# Altium PCB DE-130817.PcbDoc (part 2 of 4)
Units mil, origin at the board's own origin, x right, y up, seen from the top; angles counter-clockwise.
Board outline 5915.54 x 7594.09 mil, 2 copper layers (Top Layer, Bottom Layer), stack 12.8 mil thick; 405 components, 290 nets, 1180 pads, 331 vias.
Unrouted connection lines stored in the file: 1.
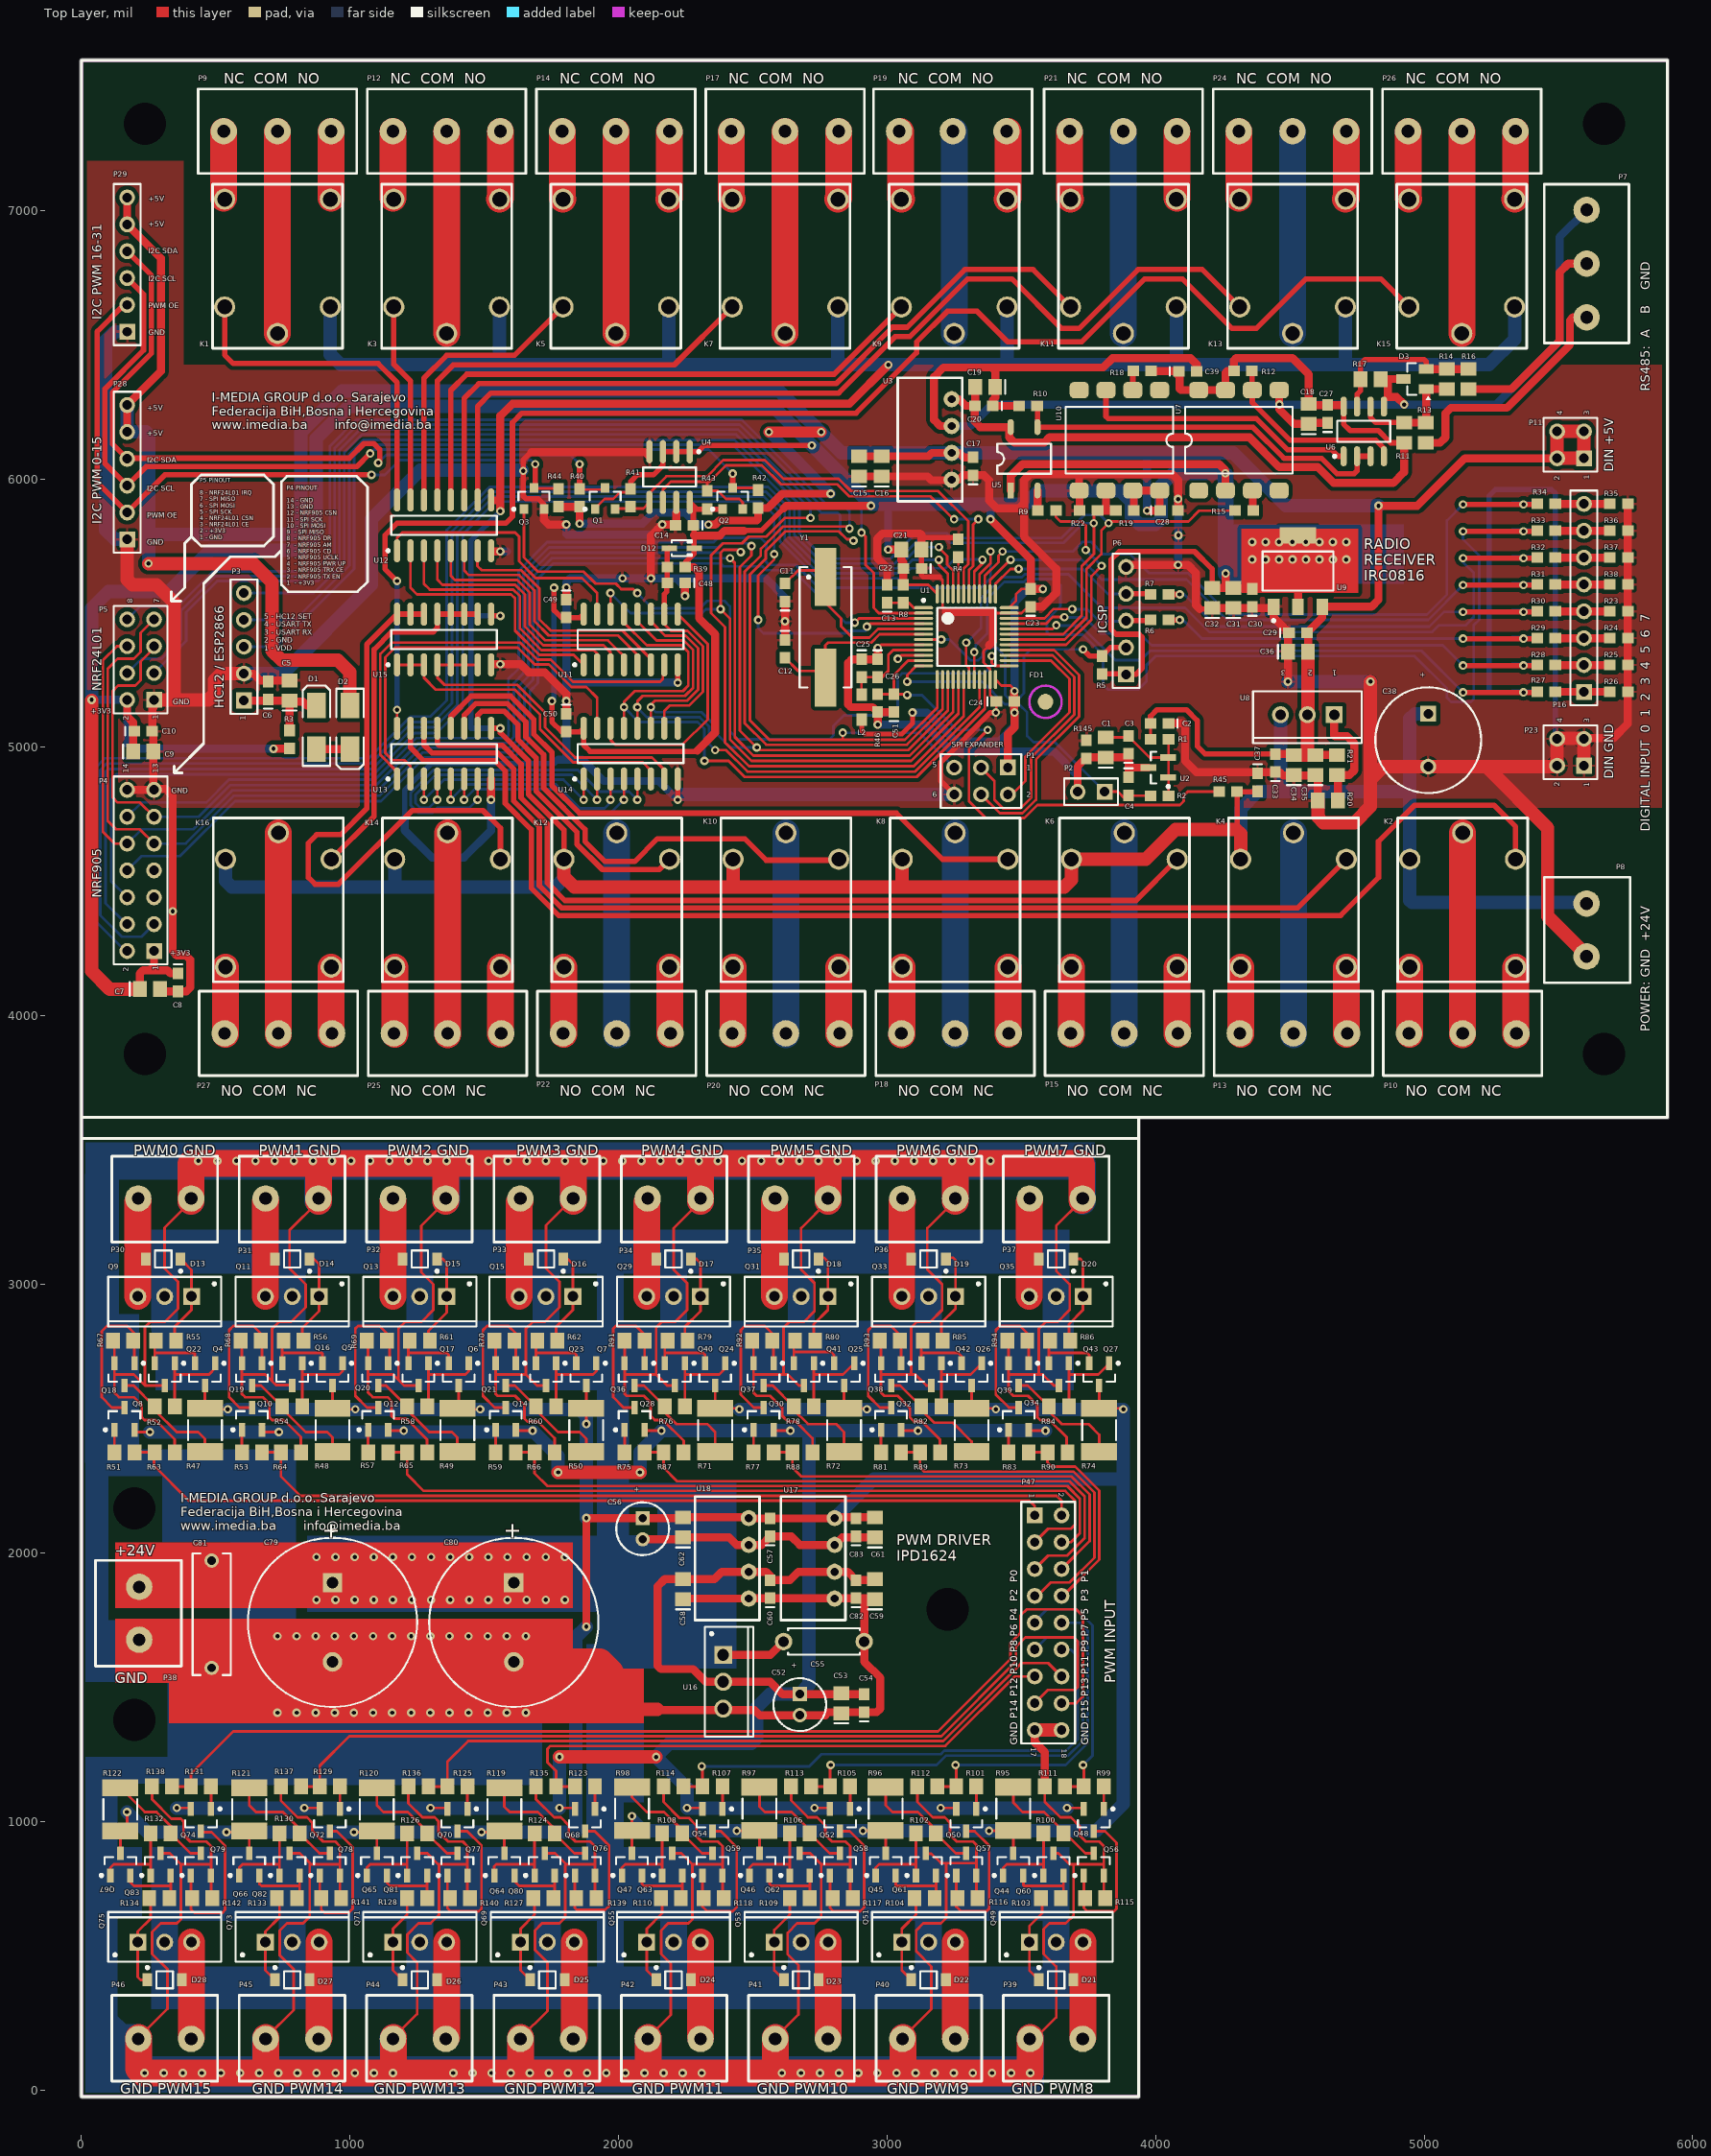
[diagram p0: Top Layer view]

## Part data (continued)
U4: library part 24AA64/SN, "64Kbit, 400kHz, 1.7V, I2C Serial EEPROM, 8-Pin SOIC 150mil, Commercial Temperature", Supplier Part Number 1=24AA64/SN-ND, Code_IPC=SOIC127P600-8, Code_JEDEC=MS-012, ComponentLink1Description=Datasheet, ComponentLink1URL=http://ww1.microchip.com/downloads/en/DeviceDoc/21189Q.pdf, ComponentLink2Description="Packaging Specification", ComponentLink2URL=http://www.microchip.com/stellent/groups/techpub_sg/documents/packagingspec/en012702.pdf, ComponentLink3Description="Microchip.com Home", ComponentLink3URL=http://www.microchip.com/, DatasheetVersion="revQ, Jun-2009", PackageDescription="8-Lead Plastic Small Outline (SN) - Narrow, 3.90mm Body [SOIC]", PackageReference=SOIC-SN8, PackageVersion="revBB, Aug-2009", Published=29-Jan-2009, Publisher="Altium Limited", Supplier 1=Digi-Key
U5: library part "PC817 optocoupler", "4-Pin Phototransistor Optocoupler", DatasheetVersion=Nov-2003, LatestRevisionDate=04-Mar-2005, LatestRevisionNote="Sch pins 3 & 4 Swapped.", PackageReference=DIP-4, Published=24-Mar-1999, Publisher="Altium Limited"
U6: "Differential Bus Transceiver", Code_IPC=SOIC127P600-8, ComponentLink1Description="Manufacturer Link", ComponentLink1URL=http://www.ti.com/, ComponentLink2Description=Datasheet, ComponentLink2URL=http://www-s.ti.com/sc/ds/sn75176b.pdf, DatasheetVersion=Sep-1989, LatestRevisionDate=13-Apr-2006, LatestRevisionNote="IPC-7351 Footprint Added.", Note="Receiver Hysteresis of 50mV Typical", PackageDescription="8-Pin Small Outline Integrated Circuit 1.27 mm Pitch", PackageReference=D008, PackageVersion=Jan-1998, Published=15-May-2002, Publisher="Altium Limited"
U7 U10: "High CMR, High Speed TTL Compatibile Optocoupler"
U8: "Three-Terminal Adjustable Output Positive Voltage Regulator", Code_JEDEC=TO-262-AA, ComponentLink1Description="Manufacturer Link", ComponentLink1URL=http://www.onsemi.com/site/products/taxonomy/0,4438,503,00.html, ComponentLink2Description=Datasheet, ComponentLink2URL=http://www.onsemi.com/pub/Collateral/LM317M-D.PDF, DatasheetVersion=Nov-1999, Note="Heatsink surface connected to Pin 2", PackageDescription="TO, Thru-Hole, Vertical, Heatsink Mounted; 3 In-Line Leads; Pitch 2.54 mm", PackageReference=221A-06, PackageVersion=1997, Published=15-Apr-2002, Publisher="Altium Limited"
U9: "800mA and 1A Low Dropout Positive Regulator 2.85V, 3.3V, 5V, and Adjustable", ComponentLink1Description="Manufacturer Link", ComponentLink1URL=http://www.ti.com/, ComponentLink2Description=Datasheet, ComponentLink2URL=http://www-s.ti.com/sc/ds/REG1117.pdf, DatasheetVersion=Sep-1997, LatestRevisionDate=17-Jul-2002, LatestRevisionNote="Re-released for DXP Platform.", PackageDescription="SOT-223/SC-73; 4 Leads; Body 6.7 x 7.3 mm, inc. leads (LxW max)", PackageReference=ZZ311, PackageVersion=revC, Published=8-Jun-2000, Publisher="Altium Limited"
U11 U14: "8-Bit Serial-Input/Serial or Prallel-Output Shift Register with Latched 3-State Outputs", Code_IPC=SOIC127P600-16, Code_JEDEC=MS-012-AC, ComponentLink1Description="Manufacturer Link", ComponentLink1URL=http://www.onsemi.com/, ComponentLink2Description=Datasheet, ComponentLink2URL=http://www.onsemi.com/pub/Collateral/MC74HC595A-D.PDF, DatasheetVersion=Mar-2000, LatestRevisionDate=13-Apr-2006, LatestRevisionNote="IPC-7351 Footprint Added.", PackageDescription="16-Pin Small Outline Integrated Circuit 1.27 mm Pitch", PackageReference=751B-05, PackageVersion=Oct-1999, Published=15-Apr-2002, Publisher="Altium Limited"
U12 U13 U15: "Seven Darlington Array", Code_IPC=SOIC127P600-16, ComponentLink1Description="Manufacturer Link", ComponentLink1URL=http://www.st.com/, ComponentLink2Description=Datasheet, ComponentLink2URL=http://www.st.com/stonline/products/literature/ds/5279/uln2001.pdf, DatasheetVersion=Sep-1998, LatestRevisionDate=13-Apr-2006, LatestRevisionNote="IPC-7351 Footprint Added.", PackageDescription="16-Pin Small Outline Integrated Circuit 1.27 mm Pitch", PackageReference=SO16, PackageVersion=May-1998, Published=8-Jun-2000, Publisher="Altium Limited"
U16: library part L7805CV, "Positive Voltage Regulator, 5V, 3-Pin TO-220", ComponentLink1Description="Manufacturer URL", ComponentLink1URL=http://www.st.com, ComponentLink2Description=Datasheet, ComponentLink2URL=http://www.st.com/internet/com/TECHNICAL_RESOURCES/TECHNICAL_LITERATURE/DATASHEET/CD00000444.pdf, ComponentLink3Description="Package Specification", ComponentLink3URL=http://www.st.com/internet/com/TECHNICAL_RESOURCES/TECHNICAL_LITERATURE/PACKAGE_INFORMATION/CD00004649.pdf, DatasheetVersion=Nov-2011, PackageDescription="TO, Thru-Hole, Vertical, Heatsink Mounted; 3 In-Line Leads; Pitch 2.54 mm", PackageReference=TO220, PackageVersion=ver3.0, PartNumber=L7805CV
Y1: library part HC49/4H_SMX, "Surface Mount Quartz Crystal", PackageDocument=18-Oct-1999, ComponentLink1Description="Manufacturer Link", ComponentLink1URL=http://www.cmac.com/mt/, ComponentLink2Description=Datasheet, ComponentLink2URL=http://www.cmac.com/mt/databook/crystals/smd/hc49_4h_smx.pdf, DatasheetDocument=18-Oct-1999, Note="PCB layout complies with manufacturer's recommendation.", PackageReference=HC49/4H_SMX, Published=17-Jul-2002, Publisher="Altium Limited"

## Free pads (board coordinates)
  round 0 hole 157.48: rupa(196.85,1377.95) rupa(196.85,2165.35) rupa(236.22,3858.27) rupa(236.22,7322.83) rupa(3225,1790) rupa(5669.29,3858.27) rupa(5669.29,7322.83)

## Via types
v1: diameter 31.5, hole 15.75, Top Layer to Bottom Layer, 331 vias

## Nets (pads, with @x,y where several pads share a name; then routed paths per layer and width w, separated by ;. In a path a pad name is that pad's centre, name@x,y a point inside that pad or via, vN(x,y) a via of type N, cw(c..) or ccw(c..) an arc to the next point about the centre after c; other vN are vias at no path point)
+3V3: C7.1 C8.1 C9.1 C10.1 C14.1 C21.2 C22.2 C23.2 C24.2 C30.2 C31.2 C32.2 C49.2 C50.2 D12.1 L2.1 P1.1 P4.1 P5.2 P6.1 Q1.1 Q2.1 R3.2 R5.2 R8.2 R39.2 R41.2 R43.2 U1.24 U1.36 U1.48 U4.1 U4.2 U4.3 U4.8 U5.1 U7.2 U9.2 U9.4 U11.16 U14.16 | length 18052.5
  Top Layer w10: Q1.1@1912.91,5877.63 1912.91,5889.91 1948,5925 1980,5925 2005.46,5950.46 R41.2@2045.32,5950.46 ; R8.2@3060.32,5605.46 3153.03,5605.46 U1.48@3187.05,5571.45 ; U1.24@3403.58,5252.55 3426.14,5230 3460,5230 3473.78,5216.22 v1@3473.78,5210 ; U1.36@3454.77,5520.27 3480,5545.5 3480,5570 3500.46,5590.46 C23.2@3535.32,5590.46
  Top Layer w18: L2.1@2905,5103.74 2905,5062 2917,5050 3055,5050 3095,5090 v1(3095,5130)
  Top Layer w20: v1(1752,5173) 1752,5095 1788.46,5058.54 C50.2@1805.32,5058.54 1857.36,5058.54 U14.16@1870.32,5071.49 1870.32,5008.68 1894,4985 2290,4985 2294,4989 ; v1(1760,5595) 1760,5511 1787.46,5483.54 C49.2@1805.32,5483.54 1857.36,5483.54 U11.16@1870.32,5496.49 ; R41.2@2045.32,5980.32 2045.32,5990.32 2070,6015 2130,6015 2165,6050 2165,6101.17 U4.3@2165.32,6101.49 U4.2@2215.32,6101.49 U4.1@2265.32,6101.49 2296.49,6101.49 2320,6125 v1(2720,6125) ; R39.2@2248.78,5671.57 2248.78,5688.78 2281.58,5721.58 D12.1@2281.58,5742 2281.58,5790 2281.58,5824.2 C14.1@2278.78,5827 2278.78,5898.41 2265,5912.2 U4.8@2265.32,5912.51 2290.2,5887.63 Q2.1@2387.91,5887.63 ; 2467.4,5807 2474.47,5807 2475.47,5808 2533,5808 2615,5890 ; R5.2@3800.32,5273.54 3888.78,5273.54 P6.1@3890.32,5272 3927,5272 3950,5295 3950,5410 3938.47,5421.53 3853.47,5421.53 3835,5440 3835,5700 3865,5730 4145,5730 4210.32,5664.68 C32.2@4210.32,5594.4
  Top Layer w30: P5.2@170.32,5177 170.32,5115.68 192.6,5093.4 C9.1@192.6,4985 ; C7.1@217.6,4100 217.6,4157.6 230,4170 255,4170 ; P4.1@270.32,4242 270.32,4185.32 255,4170 ; C8.1@360,4158.46 331.54,4158.46 320,4170 255,4170 ; v1(715,4995) 773.46,4995 R3.2@775,4996.54 ; R39.2@2248.78,5671.57 2280.43,5671.57 2300,5652 2300,5481 2360,5421 2360,5055 2294,4989 ; 2281.58,5790 2282.32,5789.25 2377.25,5789.25 2395,5807 2467.4,5807 ; 2615,5890 2625,5900 v1(2940,5900) ; v1(3004,5737) C21.2@3052.91,5737 3052.91,5697.09 3060.32,5689.68 R8.2@3060.32,5605.46 ; v1(3385,5850) 3535.32,5699.68 C23.2@3535.32,5590.46 3535.78,5590 v1(3580,5590) ; P1.1@3450,4925 3450,5050 3475,5075 v1(3475,5130) 3473.78,5131.22 C24.2@3473.78,5172 v1@3473.78,5210 ; U5.1@3460.32,5957 3460.32,6010.32 3505,6055 4237,6055 4260.32,6031.68 U7.2@4260.32,5957 ; C32.2@4210.32,5594.4 4259,5594.4 ; v1(4261,5648) 4261,5596.4 4259,5594.4 ; U9.2@4530.32,5524.13 U9.4@4530.32,5789.87 ; 4530.32,5588 4527.85,5590.46 C30.2@4360.32,5590.46 4356.38,5594.4 C31.2@4290.32,5594.4 4259,5594.4
  Top Layer w50: v1@38,5175 38,4167 105,4100 C7.1@217.6,4100
  Bottom Layer w20: v1(1752,5173) 1760,5181 v1(1760,5595)
  Bottom Layer w30: v1(38,5177) P5.2@170.32,5177 170.32,5014.68 190,4995 v1(715,4995) ; v1(3004,5737) 3004,5899 3010,5905 ; v1(3095,5130) 3148.74,5130 3255.74,5023 3418,5023 3475,5080 v1(3475,5130) ; v1(3385,5850) 3385,5900 3390,5905 ; v1(3475,5210) 3475,5541.46 3523.54,5590 v1(3580,5590)
  Bottom Layer w50: v1(38,5177) 38,5518 100,5580 325,5580 480,5735 815,5735 875,5795 875,6150 995,6270 2575,6270 2940,5905 3010,5905 3390,5905 3515,5905 3565,5955 3870,5955 3910,5915 3910,5860 3940,5830 4000,5830 4020,5850 4020,5975 4066,6021 v1@4254,6021
  Bottom Layer w60: v1(4261,5648) v1@4261,6014
  other v1: 4360,5700 4410,5700 4460,5700 4510,5700 4560,5700 4610,5700 4660,5700 4710,5700 4360,5765 4410,5765 4460,5765 4510,5765 4560,5765 4610,5765 4660,5765 4710,5765 4260,6021
+5V: C2.2 C15.2 C16.2 C17.2 C28.1 C29.2 C33.2 C34.2 C35.2 C36.2 D2.1 P11.1 P11.2 P11.3 P11.4 P28.5 P28.6 P29.5 P29.6 R1.2 R19.1 R21.1 R40.2 R42.2 R44.2 U3.2 U8.2 U9.3 U10.7 U10.8 | length 13970.5
  Top Layer w10: R1.2@3981.54,5030 C2.2@3981.54,5090
  Top Layer w20: C2.2@3981.54,5090 3981.54,5116.54 4005,5140 4115,5140 4155,5100 4155,5005 4184.54,4975.46 C33.2@4445.32,4975.46
  Top Layer w30: P28.5@170.32,6175 P28.6@170.32,6275 296,6400.68 296,6822.5 P29.5@170.32,6948.18 P29.6@170.32,7048.18 ; R44.2@1780.32,5896.43 R40.2@1850.32,5896.43 ; v1(1855,5833.46) R40.2@1855,5896.54 ; v1(2335,5830) 2360,5830 2375,5845 2515,5845 2520,5850 R42.2@2520,5891.54 2556.54,5891.54 2610,5945 v1(2790,5945) ; C15.2@2895.32,6084.4 C16.2@2980.32,6084.4 3154.4,6084.4 3167,6097 U3.2@3240.32,6097 3268,6097 3284.54,6080.46 C17.2@3320.32,6080.46 ; R19.1@3918.78,5882 3918.78,5953.54 U10.7@3915.32,5957 U10.8@4015.32,5957 C28.1@4015.32,5883.54 ; v1(3967.82,5882) C28.1@4016.85,5882 ; C33.2@4445.32,4975.46 4511.38,4975.46 C34.2@4515.32,4971.53 ; 4565,4971.53 C35.2@4595.32,4971.53 R21.1@4675.32,4971.53 ; C36.2@4567.72,5357 4567.72,5423.06 C29.2@4563.78,5427 4620.87,5484.09 U9.3@4620.87,5524.13 4804.13,5524.13 4830,5550 v1(4830,5900) 4975,5900 5152,6077 P11.2@5495.32,6077
  Top Layer w40: v1(2560,6175) v1(2755,6175)
  Top Layer w50: v1(250,5685) 640,5685 710,5615 710,5360 745,5325 955,5325 1000,5280 D2.1@1000,5155.71 ; C34.2@4515.32,4971.53 4565,4971.53 4565.32,4971.84 U8.2@4565.32,5122 ; U8.2@4567.72,5122 C36.2@4567.72,5357 ; P11.4@5495,6176.68 5495.32,6176.37 P11.2@5495.32,6077 P11.1@5595.32,6077 P11.3@5595.32,6177 P11.4@5495.32,6177
  Bottom Layer w30: v1(1855,5833.46) 2089.46,5833.46 2131,5875 2247,5875 2292,5830 v1(2335,5830) ; v1(3967.82,5882) 3967.82,6097
  Bottom Layer w40: v1(2560,6175) v1(2790,5945)
  Bottom Layer w50: P28.6@170.32,6275 P28.5@170.32,6175 240,6175 250,6165 v1(250,5685) 250,5783 260,5793 790.98,5793 817,5819.02 817,6174.02 970.98,6328 2599.02,6328 2830.02,6097 U3.2@3240.32,6097 4288,6097 4485,5900 v1(4830,5900)
+5V_COM: C18.2 C19.2 C20.2 C27.2 C39.1 R11.2 R12.1 R18.2 U3.4 U5.4 U6.8 U7.7 U7.8 | length 3381.8
  Top Layer w20: U6.8@4700.32,6269.52 4700.32,6204.68 4725,6180 4830,6180 4875.4,6134.6 R11.2@4900.4,6134.6
  Top Layer w30: U3.4@3240.32,6297 3268,6297 3293,6272 C20.2@3326.85,6272 ; C19.2@3327.91,6342 3327.91,6273.06 C20.2@3326.85,6272 ; R18.2@3983.78,6402 4068,6402 4090,6380 4090,6335 4093.98,6331.02 U7.8@4160.32,6331.02 U7.7@4260.32,6331.02 4260.32,6395.32 4267,6402 R12.1@4291.85,6402 4291.85,6441.85 4300,6450 4510,6450 4570.32,6389.68 C18.2@4570.32,6279.4 4574.25,6275.46 C27.2@4640.32,6275.46 4684.54,6275.46 ; R11.2@4925.32,6134.6 4925.32,6025.32 4885,5985 4663.33,5985 4604.33,6044 4461,6044 4350,6155 3605,6155 3585,6135 3475,6135 3455,6155 3455,6193.22 3346.78,6193.22 3326.85,6213.15 C20.2@3326.85,6272